# Altium PCB HnWrist.PcbDoc
Units mil, origin at the board's own origin, x right, y up, seen from the top; angles counter-clockwise.
Board outline 1130 x 1625 mil, 2 copper layers (Top Layer, Bottom Layer); 74 components, 55 nets, 299 pads, 96 vias.
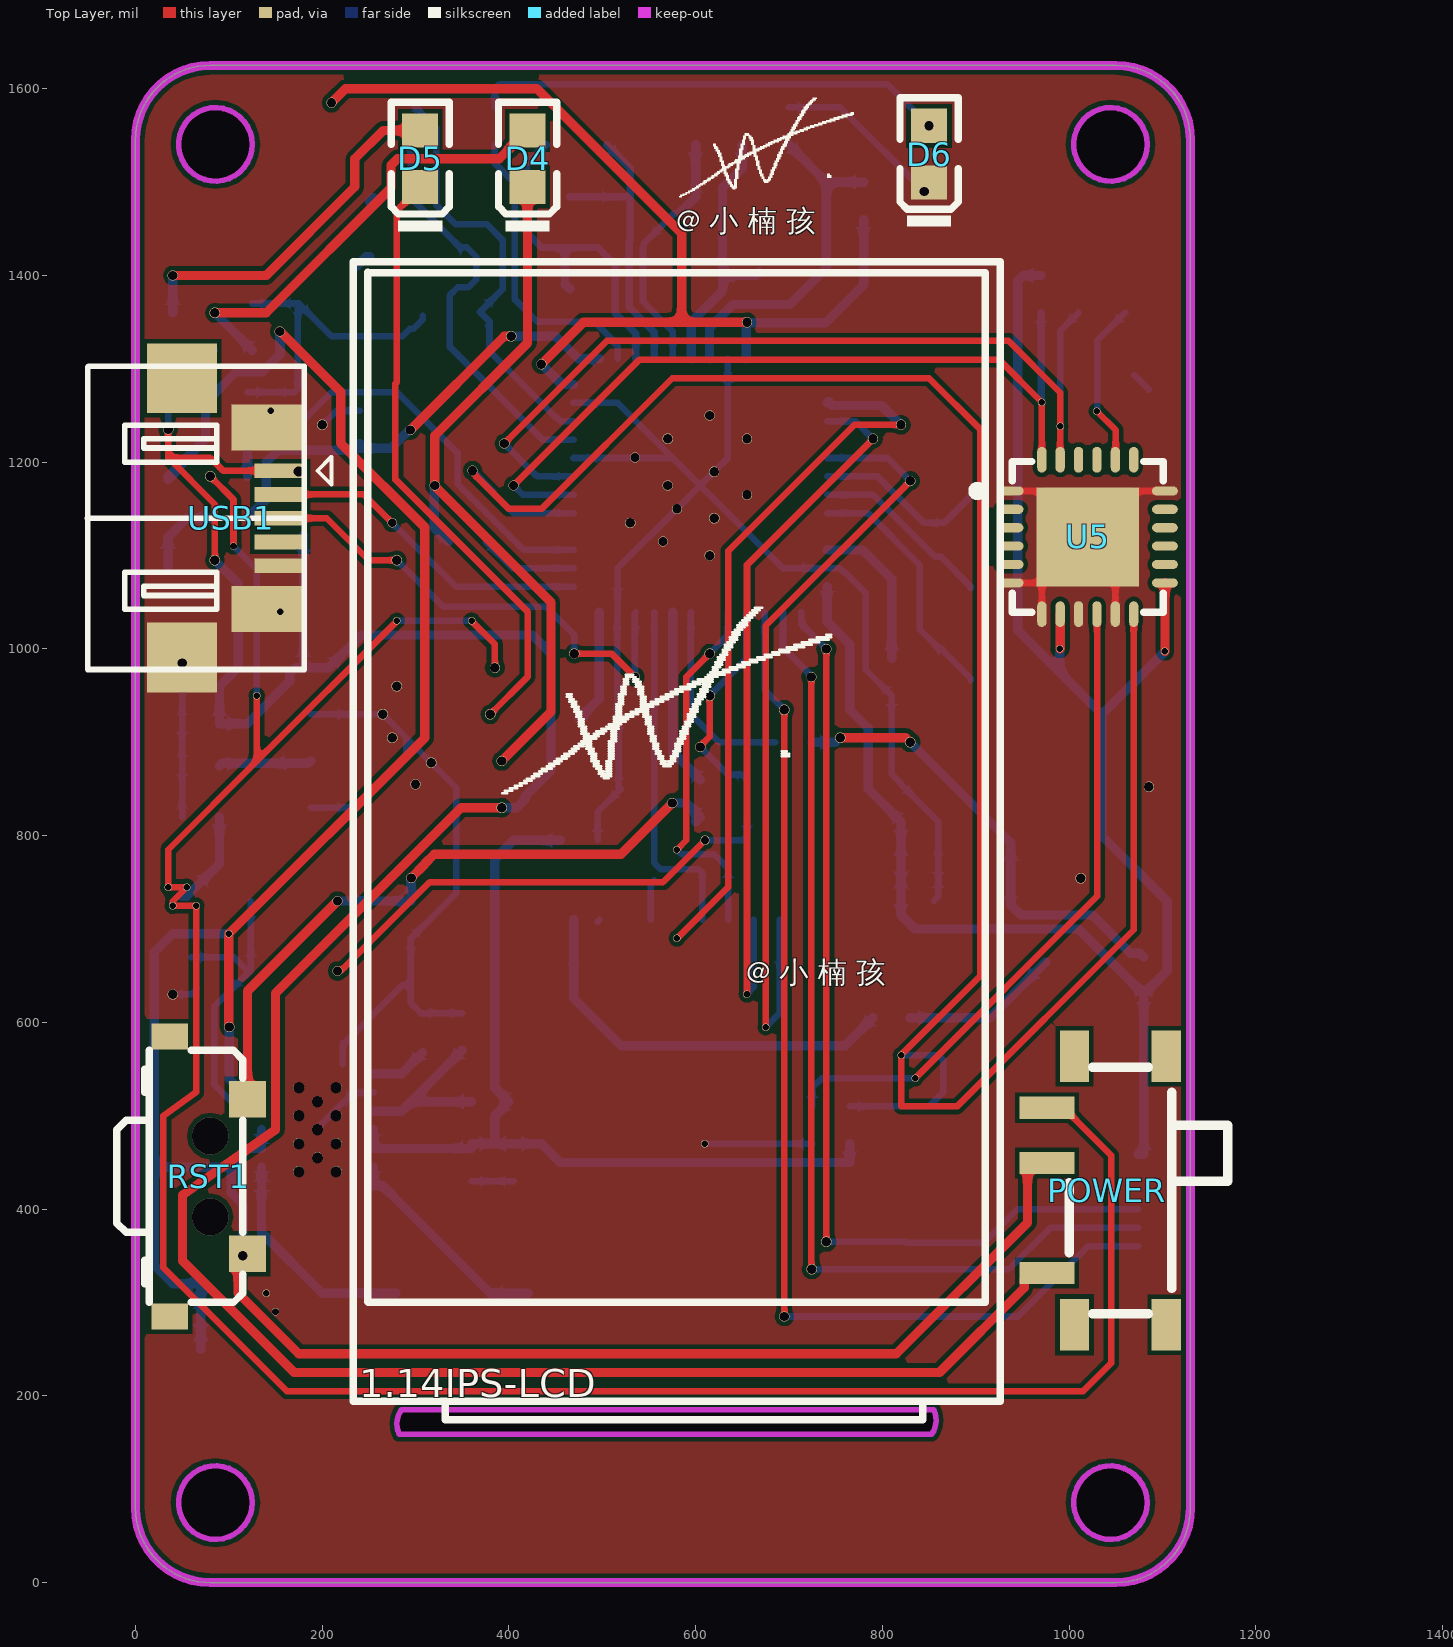
[diagram p0: Top Layer view]
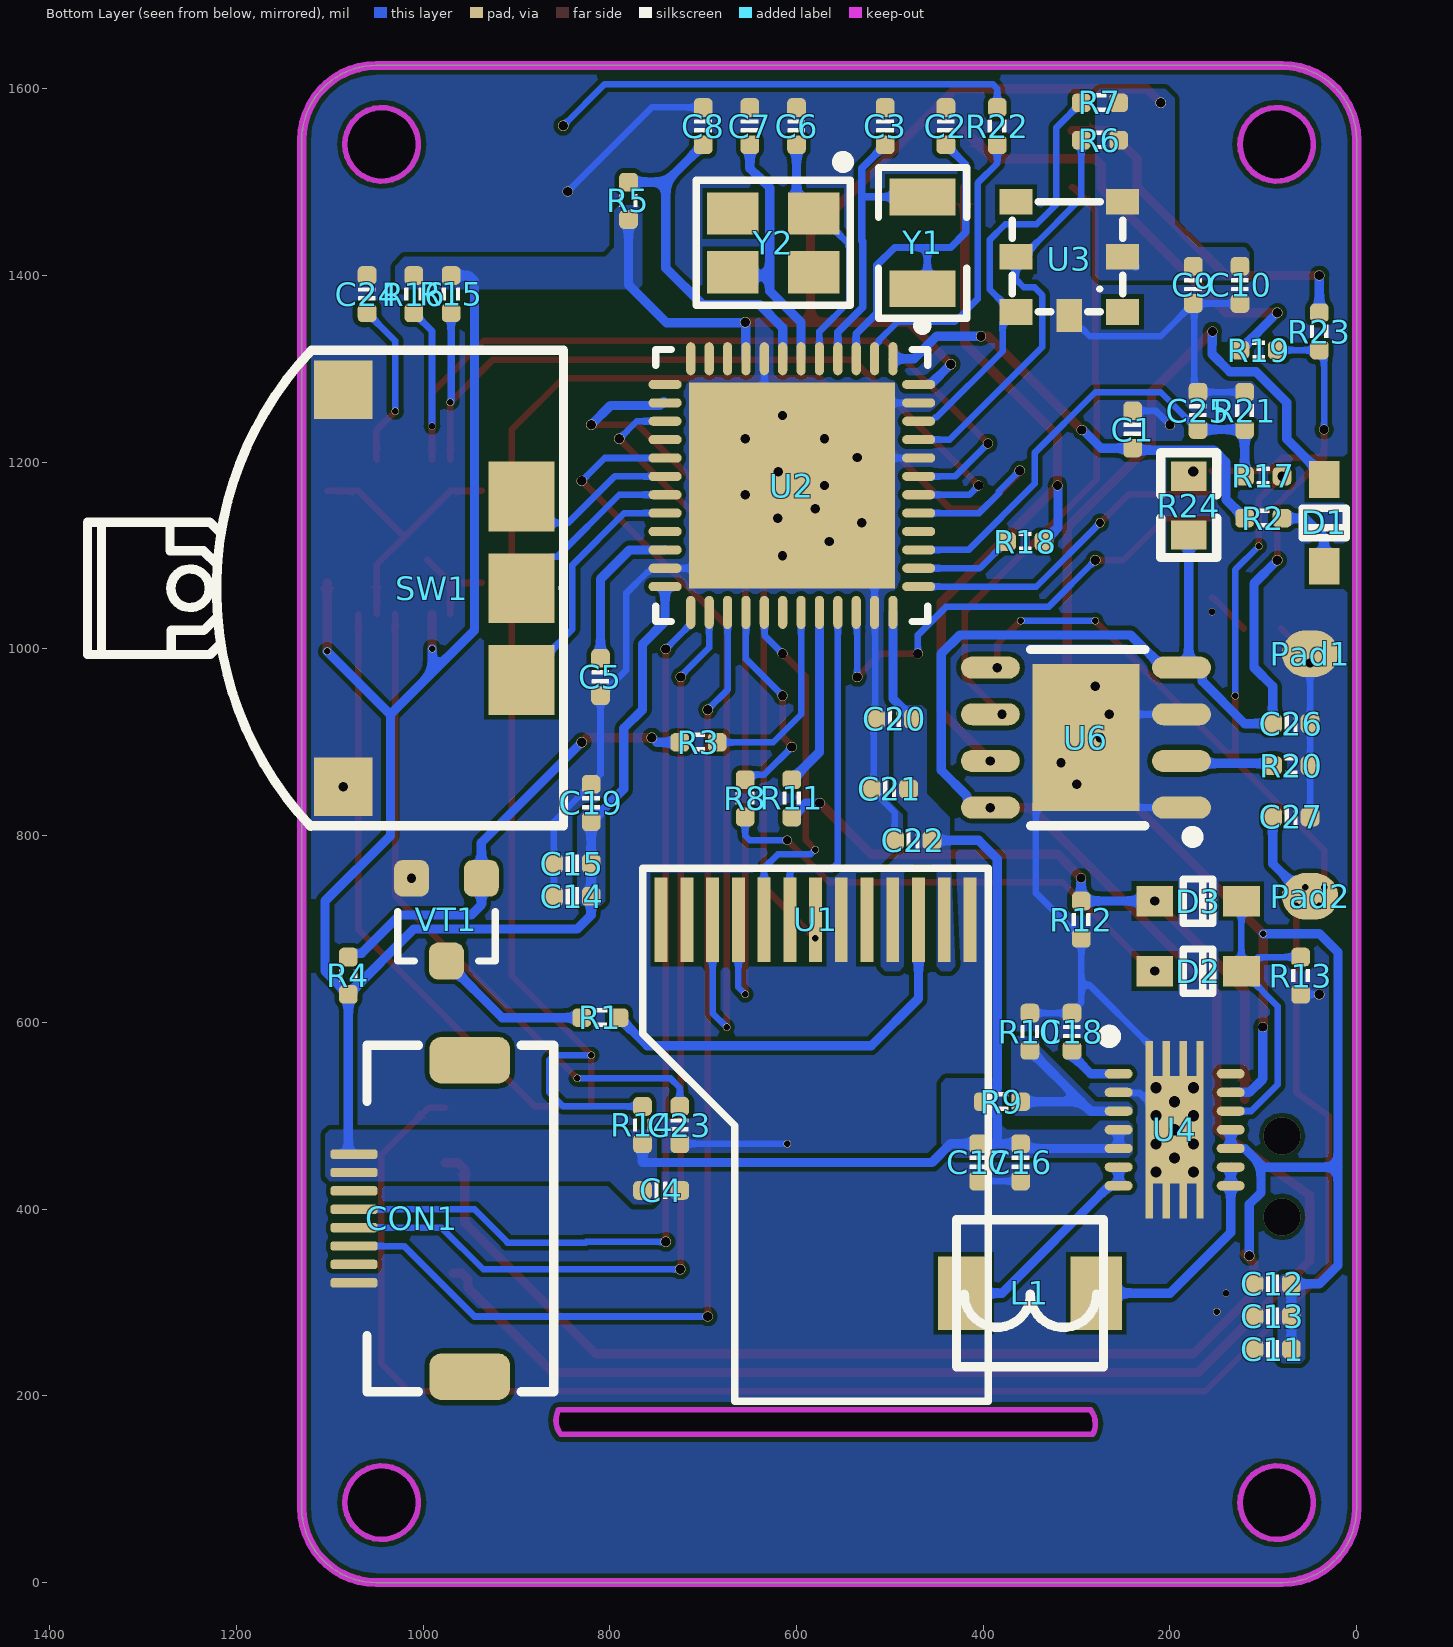
[diagram p1: Bottom Layer view, seen from below]
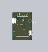
[diagram p2: 3D render of the assembled board from above, using the file's embedded part models]
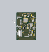
[diagram p3: 3D render of the assembled board from below, using the file's embedded part models]

## Layer stack, top to bottom
Top Solder: solder mask 0.4, Solder Resist, Dk 3.5
Top Layer: signal copper 1.4
Dielectric 1: dielectric 12.6, FR-4, Dk 4.8
Bottom Layer: signal copper 1.4
Bottom Solder: solder mask 0.4, Solder Resist, Dk 3.5

## Board outline
0,80 ccw(c80,80) 80,0 1050,0 ccw(c1050,80) 1130,80 1130,1545 ccw(c1050,1545) 1050,1625 80,1625 ccw(c80,1545) 0,1545
cut-out: 282.64,158.82 852.64,158.82 ccw(c832.64,173.82) 855,185 285,185 ccw(c305,170)
cut-out: 1005,85.63 ccw(c1044.37,85.63) 1044.37,46.26 ccw(c1044.37,85.63) 1083.74,85.63 ccw(c1044.37,85.63) 1044.37,125 ccw(c1044.37,85.63)
cut-out: 46.26,85.63 ccw(c85.63,85.63) 85.63,46.26 ccw(c85.63,85.63) 125,85.63 ccw(c85.63,85.63) 85.63,125 ccw(c85.63,85.63)
cut-out: 1005,1540.43 ccw(c1044.37,1540.43) 1044.37,1501.06 ccw(c1044.37,1540.43) 1083.74,1540.43 ccw(c1044.37,1540.43) 1044.37,1579.8 ccw(c1044.37,1540.43)
cut-out: 85.63,1501.06 cw(c85.63,1540.43) 46.26,1540.43 cw(c85.63,1540.43) 85.63,1579.8 cw(c85.63,1540.43) 125,1540.43 cw(c85.63,1540.43)
cut-out: 285,185 857.23,185 857.37,185.14

## Design rules (kind name [scope] priority, off if disabled: settings)
Clearance [All] p1: gap=5 ignorepadtopadclearanceinfootprint=FALSE
ComponentClearance [All] p1: gap=0 collisioncheckmode=3 verticalgap=0 showdistances=FALSE
DiffPairsRouting [All] p1: maxlimit=9 minlimit=9 mostfreqgap=9 toplayer_minwidth=4 toplayer_maxwidth=4 toplayer_prefwidth=4 bottomlayer_minwidth=4 bottomlayer_maxwidth=4 bottomlayer_prefwidth=4 maxuncoupledlength=500
FanoutControl Fanout_BGA [All] p1: bgadir=Out bgaviamode=Centered fanoutstyle=Auto fanoutdirection=Alternating viagrid=1 // Fanout_BGA (Default Rule)
HoleSize [All] p1: absolutevalues=TRUE maxlimit=10000 minlimit=8 maxpercent=80.000 minpercent=20.000
MinimumSolderMaskSliver [All] p1 off: minsoldermaskwidth=2
PlaneClearance [All] p1: clearance=8
PlaneConnect [All] p1: planeconnectstyle=Direct reliefexpansion=20 reliefentries=4 reliefconductorwidth=10 reliefairgap=10
PolygonConnect [All] p1: connectstyle=Direct reliefconductorwidth=10 reliefentries=4 polygonreliefangle="90 Angle" airgapwidth=10
RoutingVias [All] p1: holewidth=8 width=16 viastyle="Through Hole" minholewidth=6 minwidth=12 maxholewidth=28 maxwidth=50
SilkToSilkClearance [All] p1: silktosilkclearance=0
SilkToSolderMaskClearance [IsPad] p1: minsilkscreentomaskgap=0 clearancetoexposedcopper=TRUE
SolderMaskExpansion [All] p1: expansion=3 istentingtop=FALSE
Width [All] p1: maxlimit=10000 minlimit=4 preferedwidth=4
21 further rules are at their usual default settings.

## Classes and differential pairs
net class GND: GND
net class PWR: 3V3 BAT_CHG BAT_DET Power_All USB_VCC

## Components (designator, comment, footprint, x,y, rotation, side; value= is the part's Value field where it differs from the comment)
C1 "104" CAP_0402 240,1235 r270 bottom value=0.1u
C2 "22pF" CAP_0402 440,1560 r270 bottom value=0.1u
C3 "22pF" CAP_0402 505,1560 r270 bottom value=0.1u
C4 "1uF" CAP_0402 745,420 r0 bottom value=0.1u
C5 "4.7uF" CAP_0402 810,970 r90 bottom value=0.1u
C6 "22pF" CAP_0402 600,1560 r270 bottom value=0.1u
C7 "22pF" CAP_0402 650,1560 r270 bottom value=0.1u
C8 "104" CAP_0402 700,1560 r270 bottom value=0.1u
C9 "4.7uF" CAP_0402 175,1390 r90 bottom value=0.1u
C10 "104" CAP_0402 125,1390 r90 bottom value=0.1u
C11 "106" CAP_0402 90,250 r0 bottom value=0.1u
C12 "106" CAP_0402 90,320 r0 bottom value=0.1u
C13 "106" CAP_0402 90,285 r0 bottom value=0.1u
C14 "106" CAP_0402 840,735 r0 bottom value=0.1u
C15 "22uF" CAP_0402 840,770 r0 bottom value=0.1u
C16 "22uF" CAP_0402 360,450 r270 bottom value=0.1u
C17 "104" CAP_0402 405,450 r270 bottom value=0.1u
C18 "104" CAP_0402 305,590 r270 bottom value=0.1u
C19 "1uF" CAP_0402 820,835 r90 bottom value=0.1u
C20 "1uF" CAP_0402 495,925 r180 bottom value=0.1u
C21 "1uF" CAP_0402 500,850 r180 bottom value=0.1u
C22 "1uF" CAP_0402 475,795 r0 bottom value=0.1u
C23 "104" CAP_0402 725,490 r90 bottom value=0.1u
C24 "2.2nF" CAP_0402 1060,1380 r270 bottom value=0.1u
C25 "104" CAP_0402 170,1255 r90 bottom value=0.1u
C26 "106" CAP_0402 70,920 r0 bottom value=0.1u
C27 "106" CAP_0402 70,820 r0 bottom value=0.1u
CON1 "MAX30102" FFC_0.5_8 985,390 r90 bottom locked
D1 "1N4148" LC-SOD-323 35,1135 r90 bottom
D2 "1N4148" LC-SOD-323 170,655 r0 bottom
D3 "1N4148" LC-SOD-323 170,730 r0 bottom
D4 "红灯 0603" LC-0603_LED_S1 420,1525 r90 top
D5 "绿灯 0603" LC-0603_LED_S1 305,1525 r90 top
D6 "红灯 0603" LC-0603_LED_S1 850,1530 r90 top
L1 "1.5uH" 变压器电感_0420 350,310 r90 bottom locked
Pad1 "BAT" PAD_A 50,995 r180 bottom
Pad2 "BAT" PAD_A 50,735 r180 bottom
POWER "选择输入模式" MSK-12C01-07 1055,420 r90 top locked
R1 "10R" RES_0402 810,605 r0 bottom value=22R
R2 "10K" RES_0402 100,1140 r180 bottom value=22R
R3 "1K" RES_0402 705,900 r180 bottom value=22R
R4 "20K" RES_0402 1080,650 r270 bottom value=22R
R5 "47K" RES_0402 780,1480 r270 bottom value=22R
R6 "4.7K" RES_0402 275,1545 r180 bottom value=22R
R7 "4.7K" RES_0402 275,1585 r180 bottom value=22R
R8 "4.7K" RES_0402 655,840 r90 bottom value=22R
R9 "1M" RES_0402 380,515 r180 bottom value=22R
R10 "180K" RES_0402 350,590 r90 bottom value=22R
R11 "20K" RES_0402 605,840 r270 bottom value=22R
R12 "20K" RES_0402 295,710 r270 bottom value=22R
R13 "1M" RES_0402 60,650 r270 bottom value=22R
R14 "10K" RES_0402 765,490 r270 bottom value=22R
R15 "10K" RES_0402 970,1380 r90 bottom value=22R
R16 "10K" RES_0402 1010,1380 r90 bottom value=22R
R17 "20K" RES_0402 100,1185 r0 bottom value=22R
R18 "2K" RES_0402 355,1115 r180 bottom value=22R
R19 "2K" RES_0402 105,1320 r180 bottom value=22R
R20 "2K" RES_0402 70,875 r180 bottom value=22R
R21 "20K" RES_0402 120,1255 r90 bottom value=22R
R22 "1K" RES_0402 385,1560 r90 bottom value=22R
R23 "10K" RES_0402 40,1340 r90 bottom value=22R
R24 "0R" 0603R 180,1185 r270 bottom value=22R
RST1 "KEY" 侧面按键3*6*3.5 80,435 r90 top locked
SW1 "三档拨轮开关" SW-SMD 990,1065 r90 bottom locked
U1 "IPS-LCD" 1.14IPS-LCD -97.52,446.22 r270 top locked
U2 "STM32F401CCU6" STM-UFQFPN48_N 605,1175 r270 bottom locked
U3 "BMP180" LGA-7 447.68,1321.57 r270 bottom locked
U4 "TPS63020" TPS63020 195,485 r270 bottom locked
U5 "MPU6050" QFN-24 1020,1120 r0 top locked
U6 "TP4056" LC-SOP-8_EP_150MIL 290,905 r90 bottom
USB1 "Micro-USB" USB-MICRO_A 155,1191 r270 top locked
VT1 "S8050" SMT_TRIODE_NPN 975,710 r0 bottom
Y1 "32.768KHz" "LC-SMD-3215_2P FC - 135" 465,1435 r90 bottom
Y2 "25MHZ" LC-SMD-3225_4P 625,1435 r0 bottom locked

## Footprints (in the part's own frame and the unit in brackets; to place one, negate y for a bottom-side part, rotate by r counter-clockwise, add the part's x,y. Pads: shape width x height; smd on the part's side, far side on the other; paste and mask are expansions set on the pad)
1.14IPS-LCD [mm] "1.14寸IPS-LCD裸屏SPI接口"
  rect 2.3x0.35 smd far side: 1(-6.7,21.4) 2(-6.7,20.7) 3(-6.7,20) 4(-6.7,19.3) 5(-6.7,18.6) 6(-6.7,17.9) 7(-6.7,17.2) 8(-6.7,16.5) 9(-6.7,15.8) 10(-6.7,15.1) 11(-6.7,14.4) 12(-6.7,13.7) 13(-6.7,13)
  silkscreen extent -24.6,8.4 6.9,26
0603R [mm]
  rect 0.8x0.965 smd: 1(0,0) 2(1.6,0)
  silkscreen extent -0.64,-0.76 2.21,0.76, body extent -0.04,-0.41 1.56,0.41, height 0.45
CAP_0402 [mil]
  rrect50% 20x20 smd: 1(-20,0) 2(20,0)
  silkscreen extent -7,-9 7,9, body extent -20,-10 20,10, height 20
FFC_0.5_8 [mil]
  rrect50% 50x86 smd: 0(-169.5,-35) 0(169.5,-35)
  rrect50% 10x50 smd: 1(-68.9,89) 2(-49.21,89) 3(-29.53,89) 4(-9.84,89) 5(9.84,89) 6(29.53,89) 7(49.21,89) 8(68.9,89)
  silkscreen extent -186,-125 186,75, body extent -187,-124 187,87, height 82
LC-0603_LED_S1 [mm]
  rect 0.93x0.98 smd: A(0.77,0) K(-0.77,0)
  silkscreen extent -1.97,-0.79 1.54,0.79, body extent -0.8,-0.4 0.8,0.4, height 0.6
"LC-SMD-3215_2P FC - 135" [mm]
  rect 1x1.8 smd: 1(-1.25,0) 2(1.25,0)
  silkscreen extent -2.05,-1.2 2.05,1.2
LC-SMD-3225_4P [mm]
  rect 1.4x1.15 smd: 1(-1.1,-0.8) 2(1.1,-0.8) 3(1.1,0.8) 4(-1.1,0.8)
  silkscreen extent -2.1,-2.35 2.1,1.7, body extent -1.6,-1.25 1.6,1.25, height 0.61
LC-SOD-323 [mm]
  rect 1x0.83 smd: 1(1.18,0) 2(-1.18,0)
  silkscreen extent -0.4,-0.6 0.4,0.6, body extent -1.35,-0.63 1.35,0.63, height 1.1
LC-SOP-8_EP_150MIL [mm]
  rect 4x2.9 smd: 0(0,0)
  oval 0.6x1.6 smd: 1(-1.905,-2.6) 2(-0.635,-2.6) 3(0.635,-2.6) 4(1.905,-2.6) 5(1.905,2.6) 6(0.635,2.6) 7(-0.635,2.6) 8(-1.905,2.6)
  silkscreen extent -2.85,-3.05 2.4,1.5
LGA-7 [mm] "LGA-7Pin"
  rect 0.7x0.9 smd: 1(-1,5) 2(-2.5,5) 3(-4,5) 4(-4,2.1) 5(-2.5,2.1) 6(-1,2.1)
  rect 0.9x0.7 smd: 7(-0.9,3.55)
  silkscreen extent -4,2 -1,5
MSK-12C01-07 [mm]
  rect 1.4x0.8 smd: 0(-3.65,-1.25) 0(-3.65,1.25) 0(3.65,-1.25) 0(3.65,1.25)
  rect 0.6x1.5 smd: 1(2.25,1.996) 2(0.75,1.996) 3(-2.25,1.996)
  silkscreen extent -3.35,-2.92 3.35,1.4, body extent -3.92,-2.89 3.92,2.41, height 1.5
PAD_A [mil]
  oval 60x50 smd: 1(0,0)
QFN-24 [mm]
  oval 0.7x0.25 smd: 1(-2.1,1.25) 2(-2.1,0.75) 3(-2.1,0.25) 4(-2.1,-0.25) 5(-2.1,-0.75) 6(-2.1,-1.25) 13(2.1,-1.25) 14(2.1,-0.75) 15(2.1,-0.25) 16(2.1,0.25) 17(2.1,0.75) 18(2.1,1.25)
  oval 0.25x0.7 smd: 7(-1.25,-2.1) 8(-0.75,-2.1) 9(-0.25,-2.1) 10(0.25,-2.1) 11(0.75,-2.1) 12(1.25,-2.1) 19(1.25,2.1) 20(0.75,2.1) 21(0.25,2.1) 22(-0.25,2.1) 23(-0.75,2.1) 24(-1.25,2.1)
  rect 2.8x2.7 smd: ""(0,0)
  silkscreen extent -3.12,-2.05 2.05,2.05, body extent -2.02,-2.02 2.02,2.02, height 0.95
RES_0402 [mil]
  rrect50% 20x20 smd: 1(-20,0) 2(20,0)
  silkscreen extent -6,-10 6,10, body extent -20,-10 20,10, height 14
SMT_TRIODE_NPN [mm]
  rrect50% 0.95x1 smd: 1(-0.95,-1.125) 2(0.95,-1.125) 3(0,1.125)
  silkscreen extent -1.33,-0.22 1.32,1.13, body extent -1.45,-1.4 1.45,1.4, height 1.3
STM-UFQFPN48_N [mm] "QFN, 48-Leads, Body 7.1x7.1mm, Pitch 0.5mm, Thermal Pad 5.6x5.6mm, IPC Medium Density"
  oval 0.9x0.25 smd: 1(-3.45,2.75) 2(-3.45,2.25) 3(-3.45,1.75) 4(-3.45,1.25) 5(-3.45,0.75) 6(-3.45,0.25) 7(-3.45,-0.25) 8(-3.45,-0.75) 9(-3.45,-1.25) 10(-3.45,-1.75) 11(-3.45,-2.25) 12(-3.45,-2.75) 25(3.45,-2.75) 26(3.45,-2.25) 27(3.45,-1.75) 28(3.45,-1.25) 29(3.45,-0.75) 30(3.45,-0.25) 31(3.45,0.25) 32(3.45,0.75) 33(3.45,1.25) 34(3.45,1.75) 35(3.45,2.25) 36(3.45,2.75)
  oval 0.25x0.9 smd: 13(-2.75,-3.45) 14(-2.25,-3.45) 15(-1.75,-3.45) 16(-1.25,-3.45) 17(-0.75,-3.45) 18(-0.25,-3.45) 19(0.25,-3.45) 20(0.75,-3.45) 21(1.25,-3.45) 22(1.75,-3.45) 23(2.25,-3.45) 24(2.75,-3.45) 37(2.75,3.45) 38(2.25,3.45) 39(1.75,3.45) 40(1.25,3.45) 41(0.75,3.45) 42(0.25,3.45) 43(-0.25,3.45) 44(-0.75,3.45) 45(-1.25,3.45) 46(-1.75,3.45) 47(-2.25,3.45) 48(-2.75,3.45)
  rect 5.6x5.6 smd: 49(0,0)
  silkscreen extent -4.47,-3.7 3.7,3.7, body extent -3.55,-3.55 3.55,3.55, height 0.6
SW-SMD [mm]
  rect 1.6x1.6 smd: a(-5.4,2.425) a(5.4,2.425)
  rect 1.9x1.8 smd: b(2.5,-2.425) c(0,-2.425) d(-2.5,-2.425)
  silkscreen extent -6.48,-3.57 6.48,9.39
TPS63020 [mil] "High Efficiency Single Inductor Buck-Boost Converter With 4-A Switches"
  oval 10x30 smd: 1(-60,-60) 2(-40,-60) 3(-20,-60) 4(0,-60) 5(20,-60) 6(40,-60) 7(60,-60) 8(60,60) 9(40,60) 10(20,60) 11(0,60) 12(-20,60) 13(-40,60) 14(-60,60)
  rect 50x7.87 smd: 15(-70,-27.17) 15(-70,-9.06) 15(-70,9.06) 15(-70,27.17) 15(70,-27.17) 15(70,-9.06) 15(70,9.06) 15(70,27.17)
  round 11.81 hole 11.81: 15(-45,-20) 15(-45,20) 15(-30,0) 15(-15,-20) 15(-15,20) 15(0,0) 15(15,-20) 15(15,20) 15(30,0) 15(45,-20) 15(45,20)
  rect 115x62.2 smd: 15(0,0)
  silkscreen extent -105,-75 -95,-65, body extent -85,-65 85,65, height 30
USB-MICRO_A [mm]
  rect 1.9x1.9 smd: 0(-2.515,-2.667) 0(5.08,-2.667)
  rect 0.4x1.4 smd: 1(0,0) 2(0.648,0) 3(1.295,0) 4(1.943,0) 5(2.591,0)
  rect 1.25x2 smd: 5(-1.168,-0.33) 5(3.759,-0.33)
  silkscreen extent -2.84,-5.24 5.41,1.4, body extent -2.71,-5.08 5.25,0.34, height 2.69
侧面按键3*6*3.5 [mm]
  rect 1x1 smd: 1(-2.1,-1.016) 2(2.1,-1.016)
  rect 0.7x1 smd: 4(-3.81,1.1) 5(3.81,1.1)
  silkscreen extent -3.43,-0.89 3.43,2.54, body extent -3.43,-0.89 3.43,1.65, height 4
变压器电感_0420 [mm]
  rect 2x1.4 smd: 1(0,-1.8) 2(0,1.8)
  silkscreen extent -2,-2 2,2

## Part data
C1 C2 C3 C4 C5 C6 C7 C8 C9 C10 C11 C12 C13 C14 C15 C16 C17 C18 C19 C20 C21 C22 C23 C24 C25 C26 C27: library part 电容-0402, "Capacitor"
CON1: library part FFC_0.5_8, System=Connector
D1 D2 D3: library part "SOD-323 1N4148WS T4", "二极管", Package=SOD-323, SuppliersPartNumber=C2128, ComponentLink1Description=供应商链接, ComponentLink1URL=http://www.szlcsc.com/product/details_2485.html, Supplier=LC
D4 D6: library part "0603 红灯", "发光二极管", Package=0603, SuppliersPartNumber=C2286, ComponentLink1Description=供应商链接, ComponentLink1URL=http://www.szlcsc.com/product/details_2659.html, Supplier=LC
D5: library part "0603 绿灯", "发光二极管", Package=0603, SuppliersPartNumber=C72043, ComponentLink1Description=供应商链接, ComponentLink1URL=http://www.szlcsc.com/product/details_73152.html, Supplier=LC
L1: library part "Inductor Iron 2", _Current=10A, _Accuracy=20%, _Comma=,, _Footprint=1040, _Name=IND, _Specification=IND,1040,1.5uH,10A,20%, _Value=1.5uH
Pad1 Pad2: library part Pad, _Comma=,, _Funcyusa=Test, _Name=Pad, _Remarks=BAT, _Specification=Pad,Test,BAT
POWER: library part MSK-12C01-07
R1 R2 R3 R4 R5 R6 R7 R8 R9 R10 R11 R12 R13 R14 R15 R16 R17 R18 R19 R20 R21 R22 R23 R24: library part 电阻-0402, "Resistor"
RST1: library part SW-PB, "按键"
SW1: library part 拨轮开关, "拨轮开关", BOM_JLCPCB Part Class="Extended Part", BOM_Manufacturer="XKB Enterprise", BOM_Manufacturer Part=TM-2022-3, BOM_Supplier=LCSC, BOM_Supplier Part=C318952, Contributor=LCSC, spicePre=S, spiceSymbolName=TM-2022-3
U1: library part IPS-LCD-1.14, "IPS-LCD-1.14寸裸屏spi接口"
U2: "ARM Cortex-M4 32-bit MCU+FPU, 105 DMIPS, 256 kB Flash, 64 kB Internal RAM, 36 I/Os, 48-pin UFQFPN, -40 to 85 degC, Tray", I/Os (High Current)=36, Manufacturer=STMicroelectronics, Operating Frequency(F) (Processor speed) (MHz)=84, Supplier Part Number 1=19X6217, Supply Voltage(Vcc) max (V)=3.6, Supply Voltage(Vcc) min (V)=1.8, ComponentLink1Description="Manufacturer URL", ComponentLink1URL=http://www.st.com/web/en/home.html, ComponentLink2Description=Datasheet, ComponentLink2URL=http://www.st.com/st-web-ui/static/active/en/resource/technical/document/data_brief/DM00071938.pdf, ComponentLink3Description="Package Specification", ComponentLink3URL=http://www.st.com/st-web-ui/static/active/en/resource/technical/document/data_brief/DM00071938.pdf, Core="ARM Cortex-M4", DatasheetVersion="Rev. 1", FLASH Size (Prog) (kB)=256, Internal RAM Size (kB)=64, Mounting Technology="Surface Mount", PackageDescription="48-Pin Ultra Thin Fine Pitch Quad Flat No-Lead, 7 x 7 x 0.6 mm Body, 0.5 mm Pitch, Exposed Pad", PackageReference=UFQFPN48, PackageVersion="Rev. 1, 04/2013", Packing=Tray, PartNumber=STM32F401CCU6, Supplier 1=Newark, Supplier 2=Mouser, Supplier Part Number 2=511-STM32F401CCU6
U3: "数字气压传感器"
U5: "六轴传感器"
U6: "电池电源管理", Package=SOP-8_EP_150mil, SuppliersPartNumber=C16581, ComponentLink1Description=供应商链接, ComponentLink1URL=http://www.szlcsc.com/product/details_17264.html, Supplier=LC
VT1: library part SMT_TRIODE_NPN, "Surface mount NPN transistor, package SOT-23"
Y1: library part "SMD-3215_2P 32.768KHz 20ppm 12.5pF", "贴片晶振", Package=SMD-3215_2P, SuppliersPartNumber=C32346, ComponentLink1Description=供应商链接, ComponentLink1URL=http://www.szlcsc.com/product/details_33310.html, Supplier=LC
Y2: library part "SMD-3225_4P  25MHZ 12PF 10PPM", "贴片晶振", Package=SMD-3225_4P, SuppliersPartNumber=C9006, ComponentLink1Description=供应商链接, ComponentLink1URL=http://www.szlcsc.com/product/details_9526.html, Supplier=LC

## Via types
v1: diameter 11, hole 10, Top Layer to Bottom Layer, 66 vias
v2: diameter 8, hole 7, Top Layer to Bottom Layer, 25 vias
v3: diameter 10, hole 9, Top Layer to Bottom Layer, 2 vias
v4: diameter 39.37, hole 39.37, Top Layer to Bottom Layer, 2 vias
v5: diameter 12, hole 11, Top Layer to Bottom Layer, 1 vias

## Nets (pads, with @x,y where several pads share a name; then routed paths per layer and width w, separated by ;. In a path a pad name is that pad's centre, name@x,y a point inside that pad or via, vN(x,y) a via of type N, cw(c..) or ccw(c..) an arc to the next point about the centre after c; other vN are vias at no path point)
3V3: C4.2 C9.2 C10.2 C14.1 C15.1 C16.1 C17.1 C19.1 C20.2 C21.2 C22.1 CON1.7 CON1.8 R4.2 R5.2 R6.2 R7.2 R9.1 R14.2 R15.2 R16.2 U1.10 U1.12 U2.9 U2.24 U2.36 U2.48 U3.2 U3.3 U4.4 U4.5 U5.8 U5.13 | length 4136
  Top Layer w10: v1(210,1585) 225,1600 430,1600 585,1445 585,1350 ; v1(434.8,1305) 479.8,1350 585,1350 ; v1(655,1350) 585,1350 ; v2(990.24,1000.24) 990.47,1000.47 U5.8 ; v2(1102.68,997.32) U5.13
  Bottom Layer w7: U1.10@495,708.03 U1.10
  Bottom Layer w10: U3.2@236.89,1410 246.89,1420 U3.2 ; U3.3 U3.3@255,1483.23 ; U4.4 U4.5 C16.1@360,465 ; C16.1 382.5,470 ; v1(434.8,1305) 456.54,1283.27 U2.48 ; C22.1 405,795 385,775 385,530 R9.1 385,500 385,472.5 382.5,470 ; C20.2 496.73,946.73 U2.36 ; U2.9 654.29,1310.91 654.29,1349.02 v1@655.27,1350 ; v1(655,1350) v1@655.27,1350 ; U2.24 740.83,1029.27 765,1005.1 765,935 785,915 785,850 C19.1 C15.1 C14.1 820,715 835,700 1010,700 R4.2 ; R14.2 765,450 455,450 435,470 C17.1 382.5,470 ; R5.2 780,1390 739.36,1349.36 655.91,1349.36 v1@655.27,1350 ; R15.2 950.86,1400 945,1394.14 945,1020 990.24,974.76 ; v2(990.24,1000.24) 990.24,974.76 ; CON1.8 1080,458.9 R4.2 ; v2(1102.68,997.32) 1035.35,930 1035,930 ; 990.24,974.76 1035,930 ; 1035,930 1035,800 1105,730 1105,655 R4.2
BAT: C27.2 Pad2.1 POWER.1 R17.1 U6.5 | length 2828.8
  Top Layer w7: v1(80,1185) 105,1160 v2(105,1110) ; v2(130,950) 130,880 ; v2(280,1030) 130,880 ; v2(360,1030) 385,1005 v1(385,980) ; POWER.1 994.13,508.58 1045,457.72 1045,235 1015,205 162.18,205 30,337.18 30,500 65,525 v2(65,725) 64.81,725.19 64.62,725 v2(40,725) 40,729.73 55,744.73 v2(55,745) v2(35,745) 35,785 130,880
  Bottom Layer w7: v2(105,1110) 130,1085 v2(130,950) ; v2(280,1030) v2(360,1030)
  Bottom Layer w10: Pad2.1 55,735 90,770 C27.2
BAT_CHG: R18.1 U2.38 | length 106
  Bottom Layer w7: R18.1 403.58,1086.42 U2.38
BAT_DET: C25.1 R17.2 R21.1 U2.39 | length 505.1
  Bottom Layer w7: C25.1 190,1255 210,1275 280,1275 345,1210 345,1176.92 415.82,1106.1 U2.39
  Bottom Layer w10: R17.2 R21.1 C25.1
BMP180_SCL: R6.1 U2.45 U3.5 | length 446.7
  Bottom Layer w7: R6.1 295,1482.91 347.63,1430.28 354.72,1430.28 U3.5 365,1395.72 356.68,1387.4 345.11,1387.4 336.78,1379.07 336.78,1323.42 435.99,1224.21 U2.45
BMP180_SDA: R7.1 U2.46 U3.6 | length 461.8
  Bottom Layer w7: R7.1 321.96,1558.04 321.96,1475.75 342.93,1454.78 376.57,1454.78 393.22,1438.13 393.22,1385.22 368.94,1360.94 379.22,1350.67 379.22,1318.93 449.99,1248.16 451.34,1248.16 455.61,1243.9 U2.46
CPOUT: C24.2 U5.20 | length 178.5
  Top Layer w7: v2(1029.69,1254.69) 1050,1234.38 1050,1203.15 U5.20
  Bottom Layer w7: v2(1029.69,1254.69) 1030,1255 1030,1330 C24.2
EN: R11.1 U2.32 | length 191.4
  Bottom Layer w10: U2.32 575.47,889.53 R11.1
GND: C1.1 C2.1 C3.1 C4.1 C5.1 C6.1 C7.1 C8.1 C9.1 C10.1 C11.2 C12.2 C13.2 C14.2 C15.2 C16.2 C17.2 C18.1 C19.2 C20.1 C21.1 C22.2 C23.1 C24.1 C25.2 C26.1 C27.1 CON1.1 D6.K Pad1.1 R10.2 R12.2 R13.2 R20.2 R21.2 SW1.a U1.8 U1.13 U2.8 U2.23 U2.35 U2.44 U2.47 U2.49 U3.7 U4.2 U4.15 U5. U5.1 U5.6 U5.7 U5.9 U5.11 U5.18 U6.0 U6.1 U6.3 USB1.0@50,991 USB1.5 VT1.2 | length 3796.8
  Top Layer w7: USB1.0@50,991 USB1.0@80.89,1021.89 ; USB1.5@120.89,1021.89 142,1043 154,1055 USB1.5@155,1055 ; U5.6 U5.@970.79,1070.79 ; U5.1 970.79,1169.21 U5. ; U5.7 U5.@970.79,1070.79 ; U5.@995.39,1095.39 U5.@970.79,1070.79 ; U5.11 1049.53,1090.47 U5. ; U5.18 1069.21,1169.21 U5.
  Bottom Layer w7: v1(40,630) R13.2 R13.2@65.57,635.57 ; C27.1 R20.2 C26.1 v1(50,985) Pad1.1 ; R21.2 C25.2 174.07,1279.07 174.07,1369.07 C9.1 ; C10.1 C9.1 ; U6.1 236.41,830 290,883.59 U6.0 ; U6.3 v1(265,930) U6.0 ; U4.15@195,485 195,486.8 232.63,524.43 254.43,524.43 U4.2 ; v1(200,1240) 215,1255 C1.1 ; U4.15@222.17,555 222.17,576.06 286.1,640 295,640 ; U3.7 307.91,1353.07 297.63,1342.79 293.7,1342.79 285.91,1335 210,1335 C9.1 ; R10.2 C18.1 305,610.81 295,620.81 295,640 ; C16.2 C17.2 ; U2.44 U2.49@575.47,1204.53 ; U2.47 516.42,1263.58 U2.49@575.47,1204.53 ; C22.2 495,825 C21.1@517.5,847.5 ; C21.1 C21.1@517.5,847.5 ; U1.8 552.09,748.39 U1.8@555.79,752.09 ; v2(610,470) C23.1 ; U2.8 634.53,1204.53 v1(619.76,1189.76) U2.49 ; C8.1 755,1580 v1(845,1490) ; C14.2@855.4,730.4 C14.2 C15.2 860,815 C19.2 820,855.81 810,865.81 C5.1 782.22,977.78 782.22,1059.95 760.01,1082.15 758.66,1082.15 754.39,1086.42 U2.23 693.58,1086.42 U2.49 ; SW1.a@1070,1293.07 SW1.a@1085.47,1277.6 ; U6.0 v1(316.79,878.21) 343.59,851.41 343.59,738.59 R12.2 295,640 ; C21.1@517.5,847.5 517.5,922.5 C20.1 515.87,925.87 515.87,1038.63 U2.35 516.42,1086.42 v1(580,1150) U2.49 ; U2.49@575.47,1204.53 U2.49
  other v1: 1012.4,754.29 1085.47,852.4 300,855 275,905 280,960 615,1100 565,1115 530,1135 620,1140 655,1165 570,1175 535,1205 570,1225 655,1225 615,1250
  other v2: 150,290 140,310 155,1040 145,1255
KEY1: SW1.b U2.18 | length 186.1
  Bottom Layer w7: U2.18 794.9,1184.84 844.75,1135 866.11,1135 SW1.b
KEY2: SW1.c U2.19 | length 196.3
  Bottom Layer w7: U2.19 789.84,1165.16 856.1,1098.9 862.6,1098.9 894.53,1066.97 SW1.c
KEY3: SW1.d U2.20 | length 269.3
  Bottom Layer w7: U2.20 784.53,1145.47 840,1090 840,1021.11 860.63,1000.48 862.6,1000.48 894.53,968.54 SW1.d
LED: R22.1 U2.2 | length 319.5
  Bottom Layer w7: R22.1 385,1520 406.07,1498.93 406.07,1374.75 430.32,1350.5 491.66,1350.5 512.15,1330.01 512.15,1328.66 516.42,1324.39 U2.2
MAX30102_INT: CON1.3 U2.27 | length 1173.2
  Top Layer w7: v1(695,285) v1(695,935)
  Bottom Layer w7: U2.27 673.9,956.1 v1(695,935) ; v1(695,285) 945,285 1020.47,360.47 CON1.3
MAX30102_SCL: CON1.5 U2.25 | length 1035
  Top Layer w7: v1(740,365) v1(740,1000)
  Bottom Layer w7: U2.25 713.27,1026.73 v1(740,1000) ; v1(740,365) 825.09,365 825.99,364.1 910,364.1 910,365 944.84,399.84 CON1.5
MAX30102_SDA: CON1.4 U2.26 | length 1084.5
  Top Layer w7: v1(724,970) 724,336 v1(724.5,335.5)
  Bottom Layer w7: U2.26 693.58,1001.42 724,971 v1(724,970) ; v1(724.5,335.5) 935.5,335.5 980.16,380.16 CON1.4
MPU6050_INT: R14.1 U2.41 U5.12 | length 2385.3
  Top Layer w7: v1(361.02,1191.02) 361.02,1189.94 363.02,1187.94 363.02,1186.98 400,1150 435,1150 575,1290 850,1290 905,1235 905,650 v2(820,565) 820,510 880,510 1069.21,699.21 U5.12
  Bottom Layer w7: v1(361.02,1191.02) 383.16,1168.89 383.16,1166.84 404.53,1145.47 U2.41 ; R14.1 850,510 865,525 865,560 860,565 v2(820,565)
MPU6050_SCL: R16.1 U2.43 U5.23 | length 954.1
  Top Layer w7: v1(395,1220) 505,1330 935,1330 990.47,1274.53 v2(990.47,1238.6) U5.23
  Bottom Layer w7: v1(395,1220) 430.16,1184.84 U2.43 ; v2(990.47,1238.6) 990.47,1340.47 R16.1
MPU6050_SDA: R15.1 U2.42 U5.24 | length 866.6
  Top Layer w7: v1(405,1175) 540,1310 925,1310 v2(970.79,1264.21) U5.24
  Bottom Layer w7: v1(405,1175) 414.84,1165.16 U2.42
  Bottom Layer w8: R15.1 970,1265 v2(970.79,1264.21)
NetC1_2: C1.2 R2.1 U2.1 | length 497.7
  Top Layer w10: v1(294.5,1234.5) 395,1335 v1(402.5,1335)
  Bottom Layer w10: R2.1 140,1160 140,1200 153,1213 235,1213 235,1215 240,1220 C1.2@242.5,1217.5 ; C1.2 273.73,1215 293.04,1234.31 294.31,1234.31 v1(294.5,1234.5) ; v1(402.5,1335) 450,1335 474.17,1310.83 U2.1
NetC18_2: C18.2 U4.1 | length 61.8
  Bottom Layer w10: U4.1 285,545 C18.2@307.5,567.5
NetD1_2: D1.2 R2.2 | length 84.7
  Bottom Layer w10: D1.2 35,1120 55,1140 R2.2
NetD2_1: D2.1 R8.1 | length 518.6
  Top Layer w7: v1(216.46,655) 217.22,655.77 220.77,655.77 315,750 565,750 v3(610,795)
  Bottom Layer w7: v3(610,795) 650,795 655,800 R8.1
NetD2_2: D2.2 D3.2 R13.1 U4.12 | length 346.3
  Bottom Layer w7: R13.1 105.2,670 120.2,655 D2.2 ; D3.2 D2.2 ; U4.12@134.43,505.57 U4.12 112.98,505 84.5,533.48 84.5,617.16 117.34,650 118.54,650 D2.2
NetD3_1: D3.1 R11.2 R12.1 RST1.2 | length 712.2
  Top Layer w10: RST1.2 120,633.54 v1(216.46,730) ; v1(295.35,754.65) 295.35,754.92 309.69,769.25 309.69,769.69 320,780 520,780 v1(575,835)
  Bottom Layer w10: v1(216.46,730) R12.1 295.18,730.18 295.18,754.47 v1(295.35,754.65) ; v1(575,835) 590,835 R11.2 R11.2@600,815
NetD4_A: D4.A R19.1 | length 486.7
  Top Layer w10: v1(85,1360) 140,1360 273.71,1493.71 273.71,1517.96 280.74,1524.99 329.25,1524.99 389.68,1525 D4.A
  Bottom Layer w10: v1(85,1360) R19.1
NetD4_K: D4.K R18.2 U6.7 | length 795.7
  Top Layer w10: v1(392.36,880) 445,932.64 445,1050 320.5,1174.5 320.5,1228.25 420,1327.75 D4.K
  Bottom Layer w10: v1(320.5,1175) 320.5,1174.73 320,1174.23 320,1130 R18.2
NetD5_A: D5.A R23.2 | length 386.9
  Top Layer w10: v1(40,1400) 140,1400 235,1495 235,1525 265.32,1555.32 D5.A
  Bottom Layer w10: R23.2 v1(40,1400)
NetD5_K: D5.K U6.6 | length 651.4
  Top Layer w7: D5.K 304.02,1494.69 289.21,1479.88 289.21,1478.89 280,1469.69 280,1285.75 278.5,1284.25 278.5,1181.5 420,1040 420,970 v1(380,930)
NetD6_A: D6.A R22.2 | length 505.6
  Bottom Layer w7: R22.2 385,1600 390,1605 805.32,1605 v1(850,1560.32)
NetL1_1: L1.1 U4.8 U4.9 | length 241.1
  Bottom Layer w10: U4.9 U4.8 135,375 200,310 L1.1
NetL1_2: L1.2 U4.6 U4.7 | length 233.5
  Bottom Layer w10: U4.6 U4.7 265,425 380,310 L1.2
NetR1_2: R1.2 VT1.3 | length 169.7
  Bottom Layer w10: R1.2 915.28,605 VT1.3@975,664.72
NetR3_1: R3.1 R4.1 VT1.1 | length 493.4
  Top Layer w10: v1(755,905) 825,905 v1(830,900)
  Bottom Layer w10: R3.1 749.73,900 754.73,905 v1(755,905) ; v1(830,900) 937.6,792.4 VT1.1 937.6,725.86 948.46,715 1025,715 1065.86,674.14 1075.86,674.14 R4.1
NetR9_2: R9.2 R10.1 U4.3 | length 186.9
  Bottom Layer w10: U4.3 285,505 295,515 ; R10.1 295,515 ; R9.2 295,515
NetR20_1: R20.1 U6.2 | length 99.7
  Bottom Layer w10: R20.1 92.5,877.5 185.14,877.5 U6.2
OSC32_IN: C2.2 U2.3 Y1.1 | length 368.2
  Bottom Layer w8: C2.2 418.57,1518.57 418.57,1446.43 435,1430 460,1430 ; Y1.1@460,1390.79 460,1430 ; U2.3 536.1,1337.68 514.13,1359.65 514.13,1410.87 495,1430 460,1430
  Bottom Layer w10: Y1.1@460,1390.79 Y1.1
OSC32_OUT: C3.2 U2.4 Y1.2 | length 316.3
  Bottom Layer w8: Y1.2 529.21,1484.21 530,1485 ; C3.2 530,1515 530,1485 ; U2.4 555.79,1339.21 529.13,1365.87 529.13,1436.5 530,1437.36 530,1485
OSC_IN: C6.2 U2.5 Y2.1 | length 269
  Bottom Layer w7: U2.5 575.47,1340.03 543.63,1371.87 543.63,1430.49 544.5,1431.36 544.5,1434.22 576.77,1466.5 Y2.1
  Bottom Layer w10: Y2.1 582.36,1466.5 600,1484.13 C6.2
OSC_OUT: C7.2 U2.6 Y2.3 | length 293.1
  Bottom Layer w10: U2.6 595.16,1349.8 628.75,1383.39 628.75,1400 ; C7.2 650,1515 639.55,1504.55 639.2,1504.55 628.75,1494.1 628.75,1400 ; Y2.3 664.8,1400 628.75,1400
Power_All: C11.1 C12.1 C13.1 D1.1 POWER.2 RST1.1 U4.10 U4.11 U4.13 | length 3089.4
  Top Layer w10: v1(100.5,595) 100.5,595.27 100,595.77 v2(100,695) 310,905 310,1130 219.86,1220.14 219.86,1275.14 155,1340 v1(154.5,1340) ; RST1.1 110,342.32 110,310 175,245 815,245 955.46,385.46 955.46,442.72 962.28,449.53 POWER.2
  Bottom Layer w10: D1.1@46.34,1192.8 D1.1 35,1184.8 75,1224.8 75,1264.04 107.96,1297 136.04,1297 155,1315.96 155,1325.96 154.69,1326.27 154.69,1339.81 v1(154.5,1340) ; C11.1 C13.1 C12.1 40,320 20,340 20,445 ; v2(100,695) 40,695 20,675 20,445 ; v1(100.5,595) 100.5,539.5 115,525 U4.13 ; v1(115,350) 115,405.13 102.5,417.63 102.5,447.5 ; U4.11 U4.10 120,465 102.5,447.5 ; 20,445 100,445 102.5,447.5
Power_ON: R8.2 U2.28 | length 229.1
  Top Layer w7: v1(605,895) 605,896.08 615,906.08 v1(615,950)
  Bottom Layer w7: v1(605,895) 634.5,865.5 649.5,865.5 R8.2 ; v1(615,950) 654.21,989.21 U2.28
REGOUT: C23.2 U5.10 | length 712.3
  Top Layer w7: v2(835,540) 1030.01,735.01 1030.01,1037.16 U5.10
  Bottom Layer w7: C23.2 725,530 735,540 v2(835,540)
RST: C8.2 R5.1 U2.7 | length 373.4
  Bottom Layer w10: U2.7 614.92,1310.91 614.92,1344.14 639.65,1368.87 651.24,1368.87 700.84,1368.87 740,1408.03 740,1500 ; C8.2 740,1500 ; R5.1 740,1500
SWCLK: U2.37 USB1.2 | length 355.1
  Top Layer w7: USB1.2 244.5,1165.5 v3(275,1135)
  Bottom Layer w7: v3(275,1135) 343.27,1066.73 U2.37
SWDIO: U2.34 USB1.3 | length 531.8
  Top Layer w7: USB1.3 205,1140 250,1095 v1(280,1095) ; v1(470,995) 510,995 v1(535,970)
  Bottom Layer w7: v1(280,1095) 330,1045 440,1045 470,1015 v1(470,995) ; v1(535,970) 535,1038.07 U2.34
TFT_BLK: R3.2 U2.31 | length 211.7
  Bottom Layer w7: U2.31 595,1039.02 595,930 625,900 R3.2
TFT_CS: U1.7 U2.14 | length 768.8
  Top Layer w7: v2(580,690) 635,745 635,1105 770,1240 v1(820,1240)
  Bottom Layer w10: U2.14 742.24,1265 746.43,1260.82 799.18,1260.82 v1(820,1240)
TFT_DC: U1.5 U2.29 | length 394.9
  Top Layer w7: v2(580,785) 590,795 590,970 v1(615,995)
  Bottom Layer w7: v2(580,785) 585,780 620,780 634.76,765.24 U1.5 ; v1(615,995) 634.27,1014.27 634.27,1038.91 U2.29
TFT_LEDK: R1.1 U1.11 | length 438.4
  Bottom Layer w10: U1.11 469.41,625.59 520,575 760,575 R1.1
TFT_RES: U1.6 U2.33 | length 376.2
  Bottom Layer w7: U2.33 555.79,770.79 562.44,764.13 603.1,764.13 607.2,760.03 U1.6 U1.6@605.87,711.34
TFT_SCL: U1.4 U2.15 | length 791
  Top Layer w7: v2(655,630) 655,1090 v1(790,1225)
  Bottom Layer w7: v2(655,630) 655,630.27 662.32,637.59 U1.4 ; U2.15 771.1,1243.9 v1(790,1225)
TFT_SDA: U1.3 U2.17 | length 869.7
  Top Layer w7: v2(675,595) 675,1025 v1(830,1180)
  Bottom Layer w7: v2(675,595) 689.88,609.88 U1.3 ; U2.17 805.47,1204.53 v1(830,1180)
USB_VCC: C26.2 POWER.3 R19.2 R23.1 R24.1 R24.2 U6.4 U6.8 USB1.1 | length 3040.1
  Top Layer w7: v1(35,1235) 35,1205 ; v1(85,1095) 85,1155 35,1205 ; USB1.1 93.8,1191 79.8,1205 35,1205
  Top Layer w10: v1(392.36,830) 348.79,830 150,631.21 150,485 50.31,415 50.31,344.69 170,225 861.14,225 951.89,315.75 951.89,324.61 958.7,331.42 POWER.3@967.56,331.42
  Bottom Layer w7: v1(35,1235) 35,1315 R23.1 R19.2 ; U6.4@180,987.64 U6.4
  Bottom Layer w10: v1(85,1095) 110,1070 110,980 90,960 C26.2 119.8,920 165.35,965.55 165.35,973.71 171.64,980 U6.4 207.32,980 242.32,1015 425,1015 445,995 445,870 417.48,842.48 417.48,839.12 408.36,830 v1(392.36,830) ; U6.4@180,987.64 R24.2
  other v5: 175,1190
VCAP_1: C5.2 U2.22 | length 167.1
  Bottom Layer w10: U2.22 740.91,1106.02 778.98,1106.02 810,1075 C5.2
pads on no net: CON1.0 CON1.2 CON1.6 POWER.0 RST1.4 RST1.5 U1.1 U1.2 U1.9 U2.10 U2.11 U2.12 U2.13 U2.16 U2.21 U2.30 U2.40 U3.1 U3.4 U4.14 U5.2 U5.3 U5.4 U5.5 U5.14 U5.15 U5.16 U5.17 U5.19 U5.21 U5.22 USB1.0@50,1290 USB1.4 Y2.2 Y2.4
copper on no net:
  other v4: 80,391.69 80,478.31

## Polygon pours and split planes (outlines as drawn)
GND on Top Layer "GND_L01_P071" (solid, remove dead copper, pour order 71): -200,1340 -190,1350 -190,1605 -55,1740 1160,1740 1285,1615 1285,25 1145,-115 -30,-115 -220,75 -220,670
no net on Top Layer "NONET_L01_P035" (solid, pour order 35): -140,1675
no net on Top Layer "NONET_L01_P002" (solid, pour order 2): -495,-220
GND on Bottom Layer "GND_L02_P070" (solid, remove dead copper, pour order 70): -150,1385 -150,1615 10,1775 1260,1775 1260,1770 1415,1615 1415,-15 1255,-175 35,-175 -140,0
NetR9_2 on Bottom Layer "NETR9_2_L02_P060" (solid, pour order 60): 365,585 370,580 370,505 365,500 240,500 240,510 245,515 280,515 340,575 340,580 345,585
no net on Bottom Layer "NONET_L02_P058" (solid, pour order 58): 240,510
Power_All on Bottom Layer "POWER_ALL_L02_P055" (solid, pour order 55): 55,320 55,240 60,235 80,235 85,240 85,325 80,330 60,330
3V3 on Bottom Layer "3V3_L02_P054" (solid, pour order 54): 755,405 775,405 800,430 1100,430 1105,435 1105,480 1100,485 755,485 750,480 750,410
3V3 on Bottom Layer "3V3_L02_P053" (solid, pour order 53): 1025,1385 1030,1390 1030,1410 1020,1420 805,1420 795,1430 795,1470 790,1475 770,1475 765,1470 765,1390 770,1385
3V3 on Bottom Layer "3V3_L02_P050" (solid, pour order 50): 440.9,795 475.68,795 510,760.68 510,660 505,655 490,655 485,660 485,760 475,770 455,770 450,765 450,660 445,655 435,655 429.79,660.21 435.46,789.56
3V3 on Bottom Layer "3V3_L02_P044" (solid, pour order 44): 240,490 240,460 245,455 430,455 445,470 445,535 440,540 385,540 380,535 380,490 375,485 285,485 275,495 245,495
3V3 on Bottom Layer "3V3_L02_P015" (solid, pour order 15): 480.79,939.89 495.79,924.89 495.79,839.89 480.79,824.89 480.79,789.89 470.79,779.89 445.79,779.89 435.79,789.89 435.79,819.89 460.79,844.89 460.79,934.89 465.79,939.89
GND on Bottom Layer "GND_L02_P046" (solid, remove dead copper, pour order 46): -203.31,101605.69 -65,101744 1480,101744 1585,101639 1585,100004 1395,99814 5,99814 -155,99974
3V3 on Bottom Layer "3V3_L02_P045" (solid, pour order 45): 805,825 810,830 825,830 835,820 835,730 830,725 810,725 805,730
GND on Bottom Layer "GND_L02_P013" (solid, pour order 13): 90,325 100,335 130,335 160,305 160,250 135,225 105,225 90,240
no net on Bottom Layer "NONET_L02_P033" (solid, pour order 33): -80,1655
3V3 on Bottom Layer "3V3_L02_P024" (solid, pour order 24): 115,1400 120,1395 275,1395 280,1400 280,1595 275,1600 205,1600 195,1590 195,1455 170,1430 120,1430 115,1425 115,1420
no net on Bottom Layer "NONET_L02_P025" (solid, pour order 25): 5,1630

## Keep-outs
Keep-Out Layer:
  circle w6: c1044.37,1540.43 r39.37
  circle w6: c85.63,85.63 r39.37
  circle w6: c85.63,1540.43 r39.37
  circle w6: c1044.37,85.63 r39.37
  lines w6: 282.64,158.82 cw(c305,170) 285,185 855,185 cw(c832.64,173.82) 852.64,158.82 282.64,158.82
  lines w10: 0,80 ccw(c80,80) 80,0 1050,0 ccw(c1050,80) 1130,80 1130,1545 ccw(c1050,1545) 1050,1625 80,1625 ccw(c80,1545) 0,1545 0,80

## Silkscreen, mask and mechanical layers (free items; w line width, h text height)
Top Overlay:
  drawing of 446 lines, arcs and shapes, not listed
  text "@ 小 楠 孩" at 580,1440 h39.37
  text "@ 小 楠 孩" at 655,635 h39.37
Mechanical 1:
  lines w10: -90,0 80,0 ; 0,-125 0,80

## Dimensions
0,1545 to 1130,1545 on Mechanical 1
1050,1625 to 1050,0 on Mechanical 1

## Text inside footprints (layer, text, board x,y; h text height)
U1: Top Overlay "1.14IPS-LCD" at 239.97,198.76 h30